# EAGLE board PGTN025_raspi_interface (EAGLE 9.6.0)
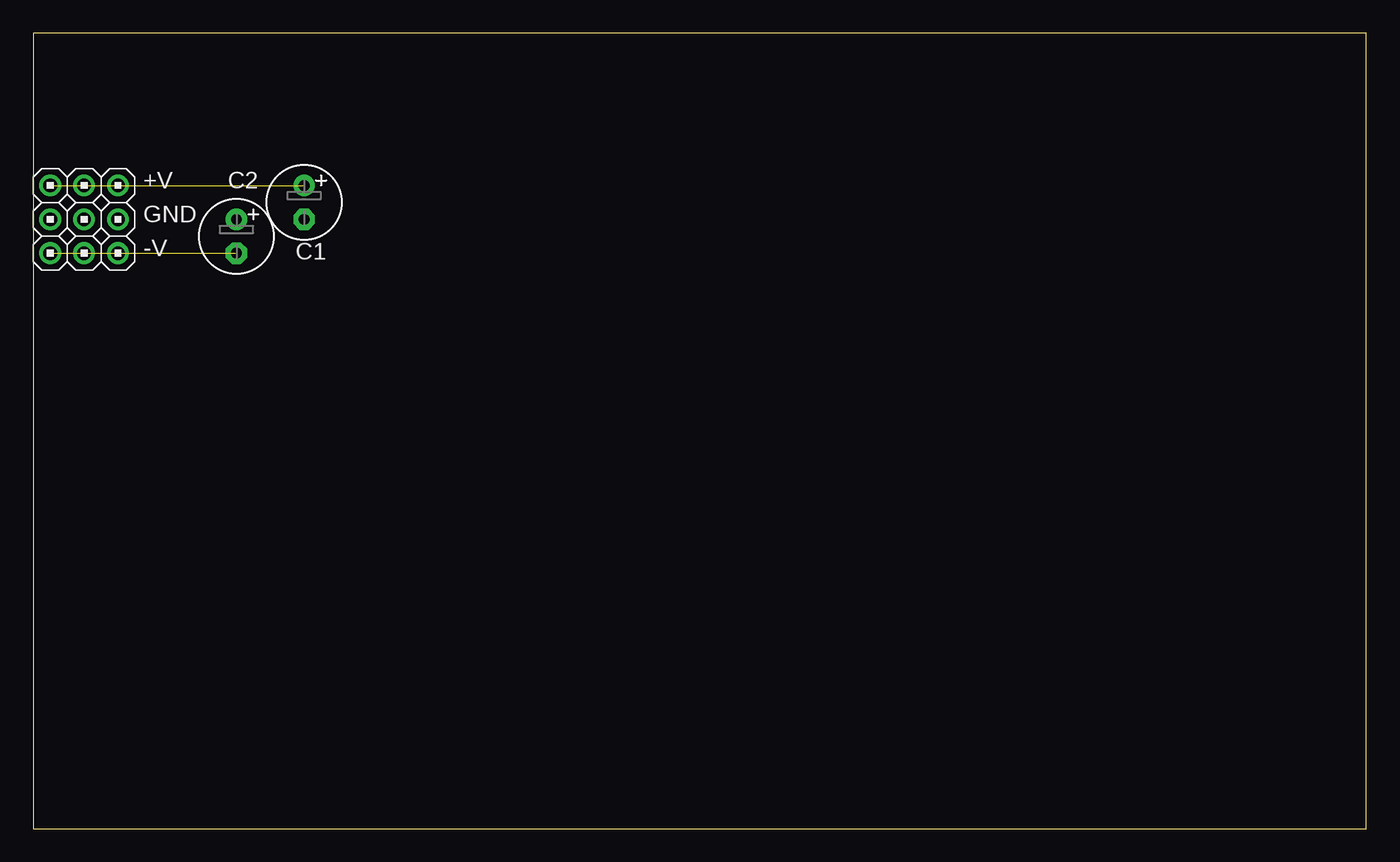
[diagram p0: board, top side]
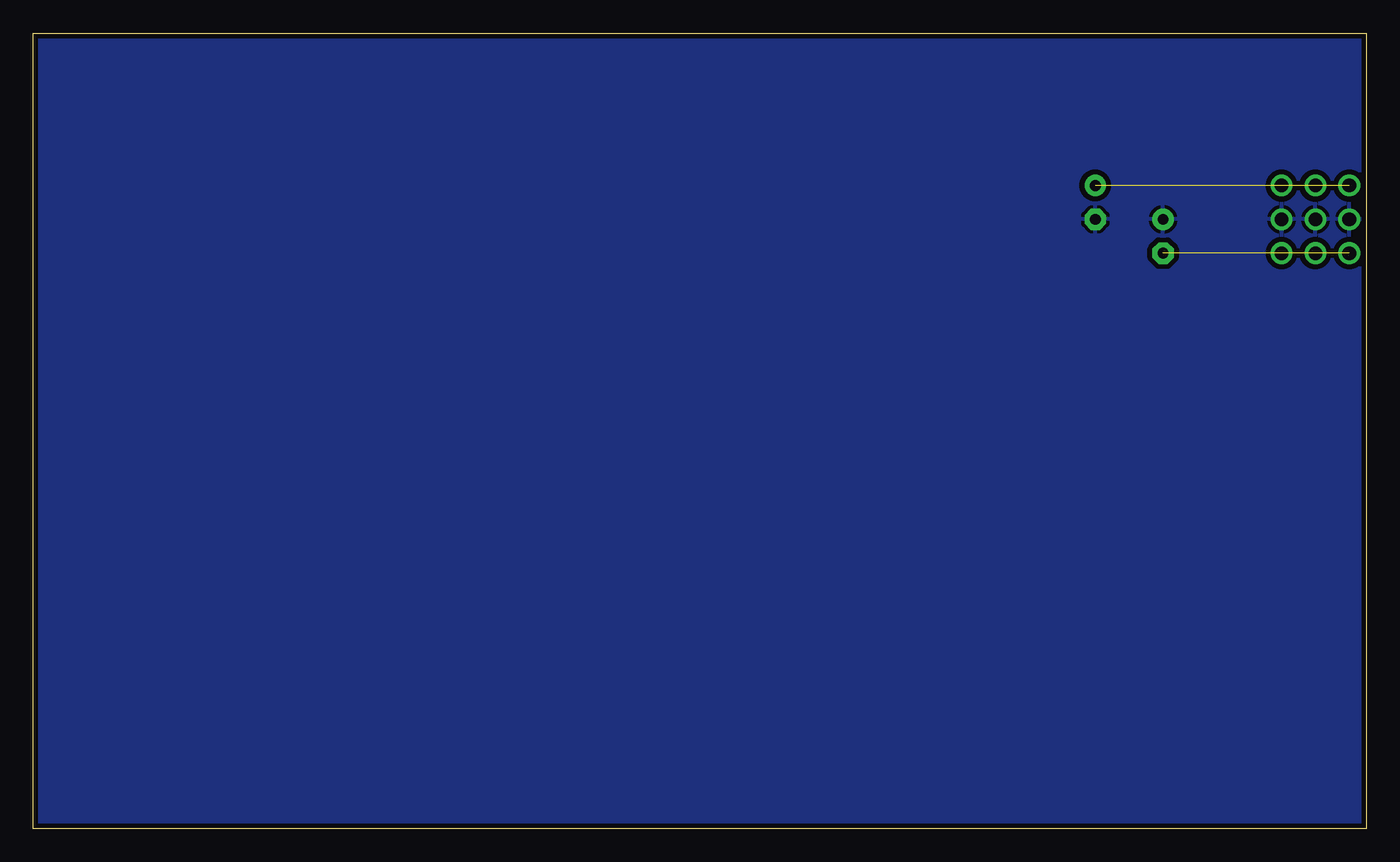
[diagram p1: board, bottom side, seen from below]

Size 100 x 59.68 mm. Coordinates in mm from the lower left corner, seen from the top.
Outline: 0,0 100,0 100,59.68 0,59.68 0,0
Copper layers (1*16): Top 0.0356mm / dielectric 1.5011mm / Bottom 0.0356mm
Design rules "pigatron": minimum track width 12mil, minimum drill 13mil, track to track 15mil, track to pad 10mil, pad to pad 10mil, via to via 10mil, smd to smd 6mil, copper to edge 15mil, drill to drill 10mil, minimum pad ring 12mil, minimum via ring 10mil, stop-mask expansion 4mil, vias tented up to drill 0mil, thermal gap 10mil

## Footprints (pad centres in the part's own frame; a part is rotated, then mirrored left to right if it is on the bottom)
HEADER/MALE/01 = drill 1.016: 1 0,0
E2,5-6 = drill 0.813 pad 1.6: + -1.27,0 | drill 0.813 pad 1.6 octagon: - 1.27,0

## Placement (x,y rotation side)
+V  HEADER/MALE/01  [HEADER/MALE/01]  6.35,48.26 0 top
+V2  HEADER/MALE/01  [HEADER/MALE/01]  3.81,48.26 0 top
+V3  HEADER/MALE/01  [HEADER/MALE/01]  1.27,48.26 0 top
-V  HEADER/MALE/01  [HEADER/MALE/01]  6.35,43.18 0 top
-V2  HEADER/MALE/01  [HEADER/MALE/01]  3.81,43.18 0 top
-V3  HEADER/MALE/01  [HEADER/MALE/01]  1.27,43.18 0 top
C1  10uF  [E2,5-6]  20.32,46.99 270 top
C2  10uF  [E2,5-6]  15.24,44.45 270 top
GND  HEADER/MALE/01  [HEADER/MALE/01]  6.35,45.72 0 top
GND2  HEADER/MALE/01  [HEADER/MALE/01]  1.27,45.72 0 top
GND3  HEADER/MALE/01  [HEADER/MALE/01]  3.81,45.72 0 top

## Library data of the parts
+V +V2 +V3 -V -V2 -V3 GND GND2 GND3 = connectors; SPICEPREFIX: X
C1 C2 = capacitors; SPICEPREFIX: C

## Nets
+12V: +V2.1 +V3.1 +V.1 C1.+
-12V: -V2.1 -V3.1 -V.1 C2.-
GND: C1.- C2.+ GND2.1 GND3.1 GND.1

## Tracks (layer width: path | path; a pad name or v marks a point on that pad's centre or on a via)
+12V  (3 unrouted)
-12V  (3 unrouted)
GND
  pour Bottom: 0,59.69 0,0 100.33,0 100.33,59.69